# EAGLE board MFD KEYBOARD V1_0 (EAGLE 5.06)
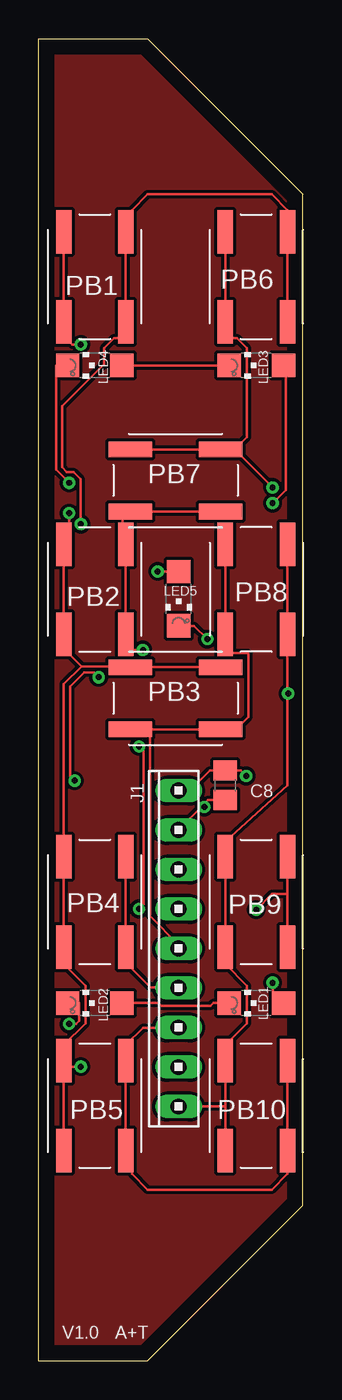
[diagram p0: board, top side]
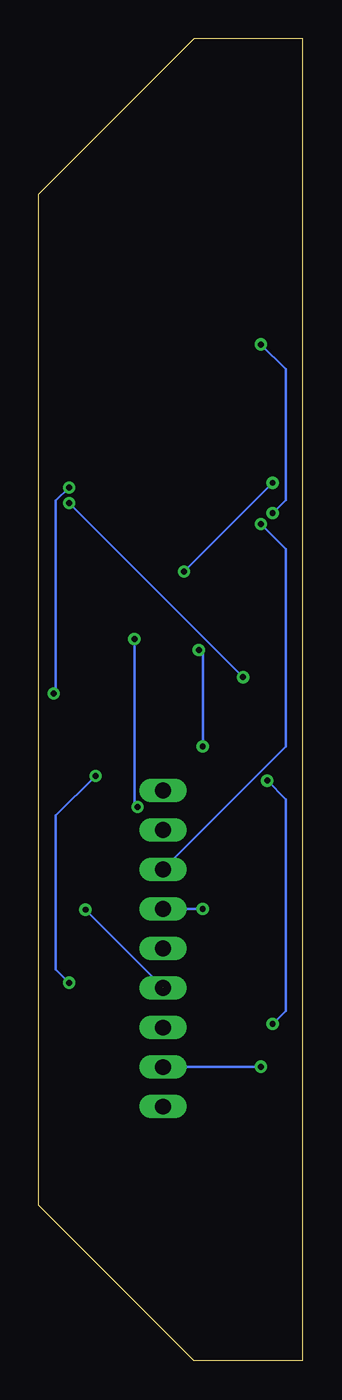
[diagram p1: board, bottom side, seen from below]

Size 17 x 85 mm. Coordinates in mm from the lower left corner, seen from the top.
Outline: 0,0 7,0 17,10 17,75 7,85 0,85 0,0
Copper layers (1*16): Top 0.035mm / dielectric 1.5mm / Bottom 0.035mm
Design rules "default *": minimum track width 6mil, minimum drill 15mil, track to track 8mil, track to pad 8mil, pad to pad 8mil, via to via 8mil, smd to smd 8mil, copper to edge 40mil, drill to drill 8mil, minimum pad ring 10mil, minimum via ring 8mil, stop-mask expansion 4mil, vias tented up to drill 0mil, thermal gap 10mil

## Footprints (pad centres in the part's own frame; a part is rotated, then mirrored left to right if it is on the bottom)
C0805 = smd 1.3 x 1.5: 1 -0.95,0; 2 0.95,0
10X09MTA = drill 1.016 long: 1 10.16,0; 2 7.62,0; 3 5.08,0; 4 2.54,0; 5 0,0; 6 -2.54,0; 7 -5.08,0; 8 -7.62,0; 9 -10.16,0
CHIPLED_1206 = smd 1.5 x 1.5: A 0,-1.75; C 0,1.75
C&K = smd 2.8 x 1: P$1 -2.9,2; P$2 -2.9,-2; P$3 2.9,2; P$4 2.9,-2

## Placement (x,y rotation side)
C8  100n  [C0805]  12,37 270 top
J1  [10X09MTA]  9,26.5 90 top
LED1  [CHIPLED_1206]  14,23 90 top
LED2  [CHIPLED_1206]  3.6,23 90 top
LED3  [CHIPLED_1206]  14,64 90 top
LED4  [CHIPLED_1206]  3.6,64 90 top
LED5  [CHIPLED_1206]  9,49 180 top
PB1  C&K  [C&K]  3.6,69.7 90 top
PB2  C&K  [C&K]  3.6,49.6 90 top
PB3  C&K  [C&K]  8.8,42.6 0 top
PB4  C&K  [C&K]  3.6,29.5 90 top
PB5  C&K  [C&K]  3.6,16.4 90 top
PB6  C&K  [C&K]  14,69.7 90 top
PB7  C&K  [C&K]  8.8,56.6 0 top
PB8  C&K  [C&K]  14,49.6 270 top
PB9  C&K  [C&K]  14,29.5 90 top
PB10  C&K  [C&K]  14,16.4 90 top

## Library data of the parts
C8 = rcl
J1 = con-amp
LED1-LED5 = led
PB1-PB10 = tactile

## Nets
N$1: J1.8 PB1.P$1 PB1.P$3 PB2.P$1 PB2.P$3 PB3.P$1 PB3.P$3 PB4.P$1 PB4.P$3 PB5.P$1 PB5.P$3
N$2: J1.9 PB6.P$1 PB6.P$3 PB7.P$1 PB7.P$3 PB8.P$1 PB8.P$3 PB9.P$1 PB9.P$3 PB10.P$1 PB10.P$3
N$3: C8.2 J1.2 LED5.C
N$4: J1.4 PB2.P$2 PB2.P$4 PB7.P$2 PB7.P$4
N$5: J1.5 PB3.P$2 PB3.P$4 PB8.P$2 PB8.P$4
N$6: C8.1 J1.1 LED1.A
N$7: J1.6 PB4.P$2 PB4.P$4 PB9.P$2 PB9.P$4
N$8: J1.7 PB5.P$2 PB5.P$4 PB10.P$2 PB10.P$4
N$9: LED1.C LED2.A
N$10: J1.3 PB1.P$2 PB1.P$4 PB6.P$2 PB6.P$4
N$11: LED2.C LED3.A
N$12: LED3.C LED4.A
N$14: LED4.C LED5.A

## Tracks (layer width: path | path; a pad name or v marks a point on that pad's centre or on a via)
N$1  (via drill 0.38)
  Top 0.152: PB5.P$1 PB5.P$3 | v2.7,18.9 1.65,18.9 PB5.P$3 | PB5.P$3 1.6,20.3 3,21.7 3,24.1 1.6,25.5 PB4.P$1 PB4.P$3 1.6,43.5 2.75,44.65 | PB1.P$3 PB1.P$1 1.6,65.9 2.15,65.35 v2.7,65.35 | PB3.P$3 PB3.P$1 4.9,44.6 4.85,44.65 2.75,44.65 | 2.75,44.65 1.6,45.8 PB2.P$1 PB2.P$3 1.6,53.5 1.95,53.85 v1.95,54.5
  Bottom 0.152: v2.7,18.9 9,18.9 J1.8 | v2.7,65.35 1.1,63.75 1.1,55.35 v1.95,54.5
N$2  (via drill 0.38)
  Top 0.152: PB7.P$3 PB7.P$1 | PB6.P$3 PB6.P$1 12,65.8 12.05,65.75 12.75,65.75 13.4,65.1 13.4,59.4 12.6,58.6 PB7.P$3 | 12,16.35 PB10.P$3 12,20.3 13.4,21.7 13.4,24.1 12,25.5 PB9.P$1 PB9.P$3 12,33.4 16,37 16,42.75 16.05,42.85 v16.05,42.9 16,42.85 PB8.P$1 | PB10.P$1 12,16.35 | J1.9 12,16.35 | v15.05,56.15 12.65,58.55 PB7.P$3 | PB8.P$1 PB8.P$3 | PB8.P$1 16,52.9 15.9,53 15.9,52
  Bottom 0.152: v15.05,56.15 15.9,55.3 15.9,42.75 v16.05,42.9
N$3  (via drill 0.38)
  Top 0.152: C8.2 10.9,36.05 10.55,35.7 | 10.55,35.7 9,34.15 J1.2 | LED5.C 10,47.25 v10.85,46.4 | 10.55,35.7 v10.65,35.6
  Bottom 0.152: v10.85,46.4 10.85,35.8 v10.65,35.6
N$4  (via drill 0.38)
  Top 0.152: PB7.P$4 PB7.P$2 5.4,54.6 5.4,53.7 5.6,53.5 PB2.P$4 PB2.P$2 5.6,45.75 5.65,45.7 v6.7,45.7 | v6.45,29.05 6.75,29.35 6.75,39.2 v6.45,39.5
  Bottom 0.152: v6.45,29.05 J1.4 | v6.45,39.5 6.45,45.45 v6.7,45.7
N$5
  Top 0.152: PB8.P$2 PB8.P$4 12,45.8 12.3,45.5 13.45,45.5 13.5,45.45 13.5,41.4 12.7,40.6 PB3.P$4 PB3.P$2 7.15,40.55 7.15,28.6 9,26.75 J1.5
N$6  (via drill 0.38)
  Top 0.152: LED1.A 15.05,23 v15.05,24.3 | v13.35,37.6 13,37.95 C8.1 11,37.95 9.75,36.7 9,36.7 J1.1
  Bottom 0.152: v15.05,24.3 15.9,25.15 15.9,35.05 v13.35,37.6
N$7  (via drill 0.38)  (1 unrouted)
  Top 0.152: PB4.P$4 PB4.P$2 5.6,25.6 7.2,24 9,24 J1.6 | 16,30 PB9.P$4 | 16,30 PB9.P$2 | 16,30 15,30 v14,29
  Bottom 0.152: 9,24 v14,29
N$8
  Top 0.1: 6,13.1 PB5.P$2
  Top 0.152: PB5.P$2 PB5.P$4 5.6,20.3 6.7,21.4 9,21.4 J1.7 | 6,13.1 6,12 7,11 15,11 16,12 PB10.P$2 PB10.P$4
N$9
  Top 0.152: LED2.A 7.7,23 7.9,22.8 11.05,22.8 11.25,23 LED1.C
N$10  (via drill 0.38)
  Top 0.152: v2.7,53.8 2.7,56.7 2.25,57.15 1.8,57.15 1.5,57.45 1.5,61.4 4.2,64.1 4.2,65.1 4.85,65.75 5.55,65.75 5.6,65.8 PB1.P$2 PB1.P$4 6,73 6,74 7,75 15,75 16,74 PB6.P$4 PB6.P$2
  Bottom 0.152: v2.7,53.8 1.1,52.2 1.1,39.5 9,31.6 J1.3
N$11  (via drill 0.38)
  Top 0.152: LED2.C 2.6,23 2.6,21.85 2.4,21.65 v1.95,21.65 | v2.3,37.3 2,37.6 2,43.35 2.9,44.25 3.55,44.25 v3.85,43.95 | v15.05,55.15 15.9,56 15.9,64 LED3.A
  Bottom 0.152: v1.95,21.65 1.1,22.5 1.1,36.1 v2.3,37.3 | v3.85,43.95 v15.05,55.15
N$12
  Top 0.152: LED4.A LED3.C
N$14  (via drill 0.38)
  Top 0.152: LED5.A v7.65,50.75 | v1.95,56.45 1.1,57.3 1.1,64 LED4.C
  Bottom 0.152: v7.65,50.75 v1.95,56.45
N$15
  pour Top: 0,85 7,85 17,75 17,10 7,0 0,0

## Text on the board
tNames: V1.0 | A+T